# Altium PCB MSXIV_BatteryModuleConnectorBoard.PcbDoc
Units mm, origin at the board's own origin, x right, y up, seen from the top; angles counter-clockwise.
Board outline 46.4 x 46.3 mm, 2 copper layers (Top Layer, Bottom Layer); 15 components, 22 nets, 56 pads, 0 vias.
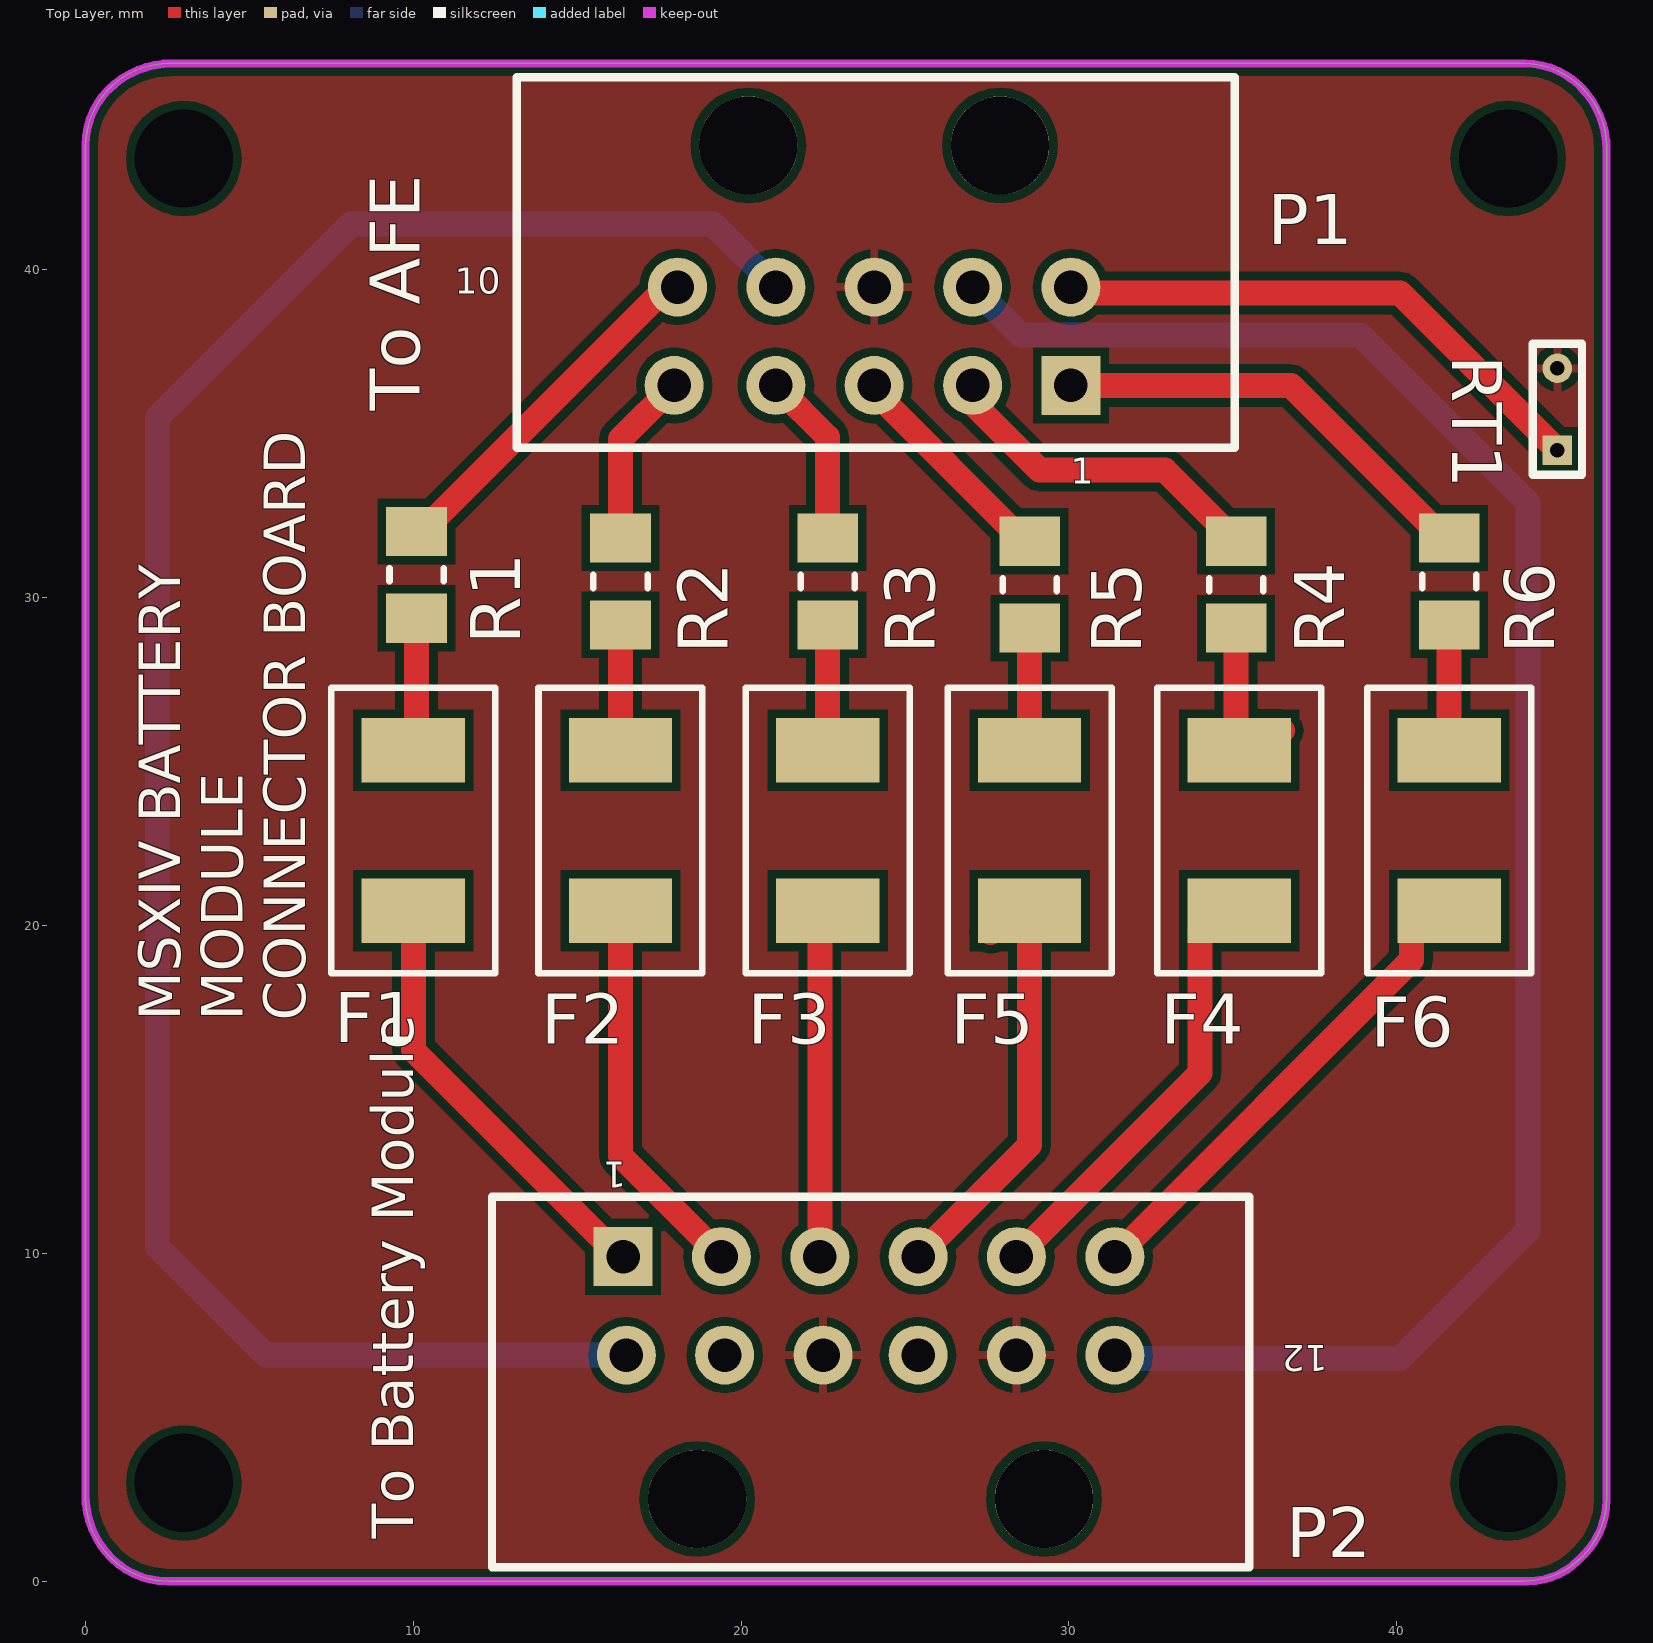
[diagram p0: Top Layer view]
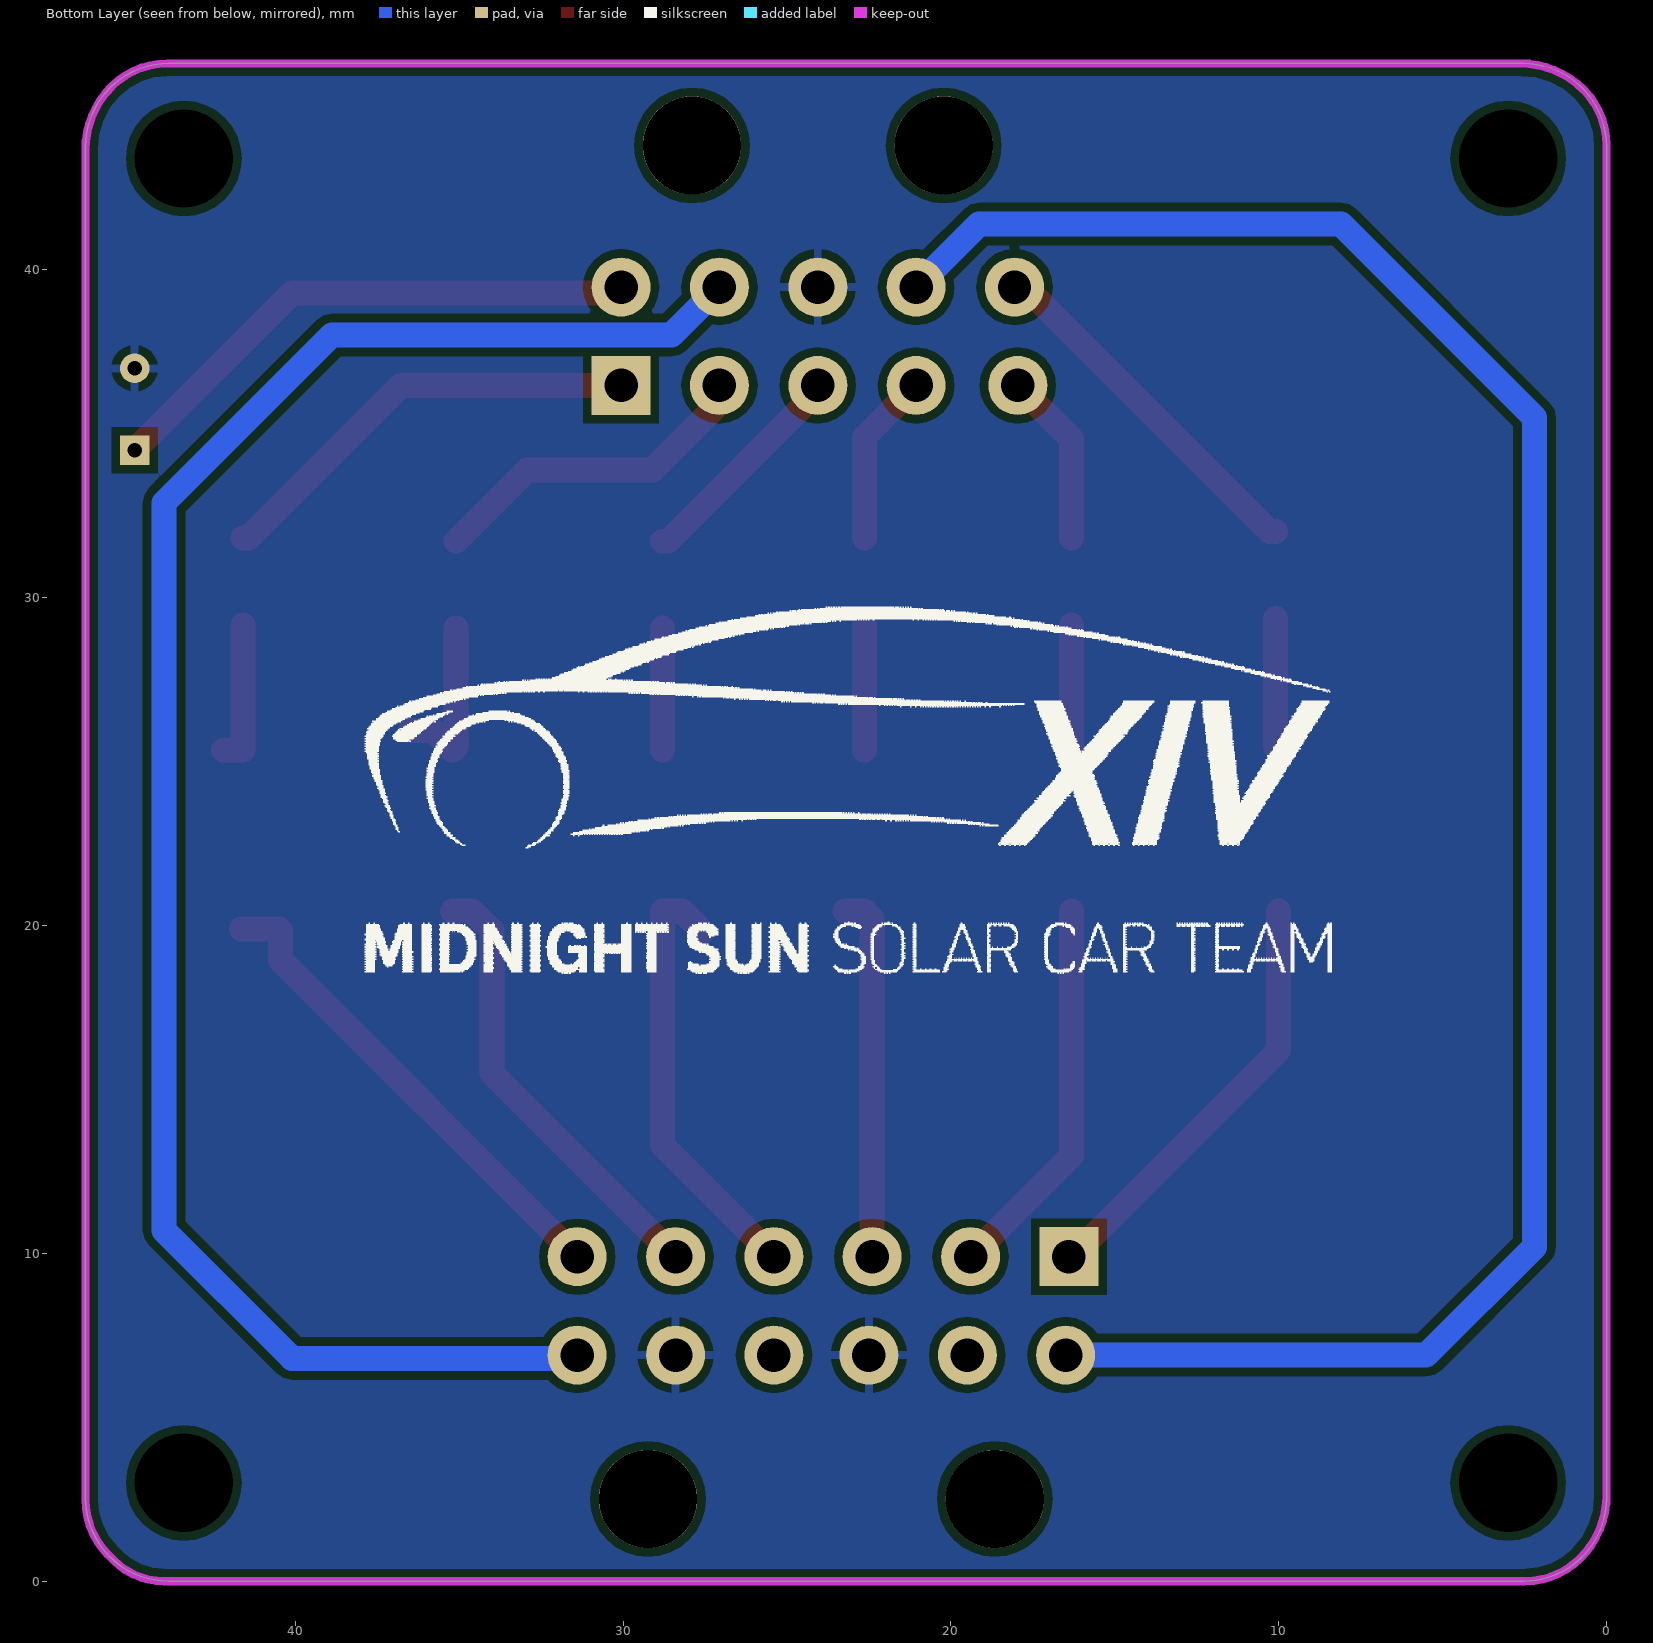
[diagram p1: Bottom Layer view, seen from below]
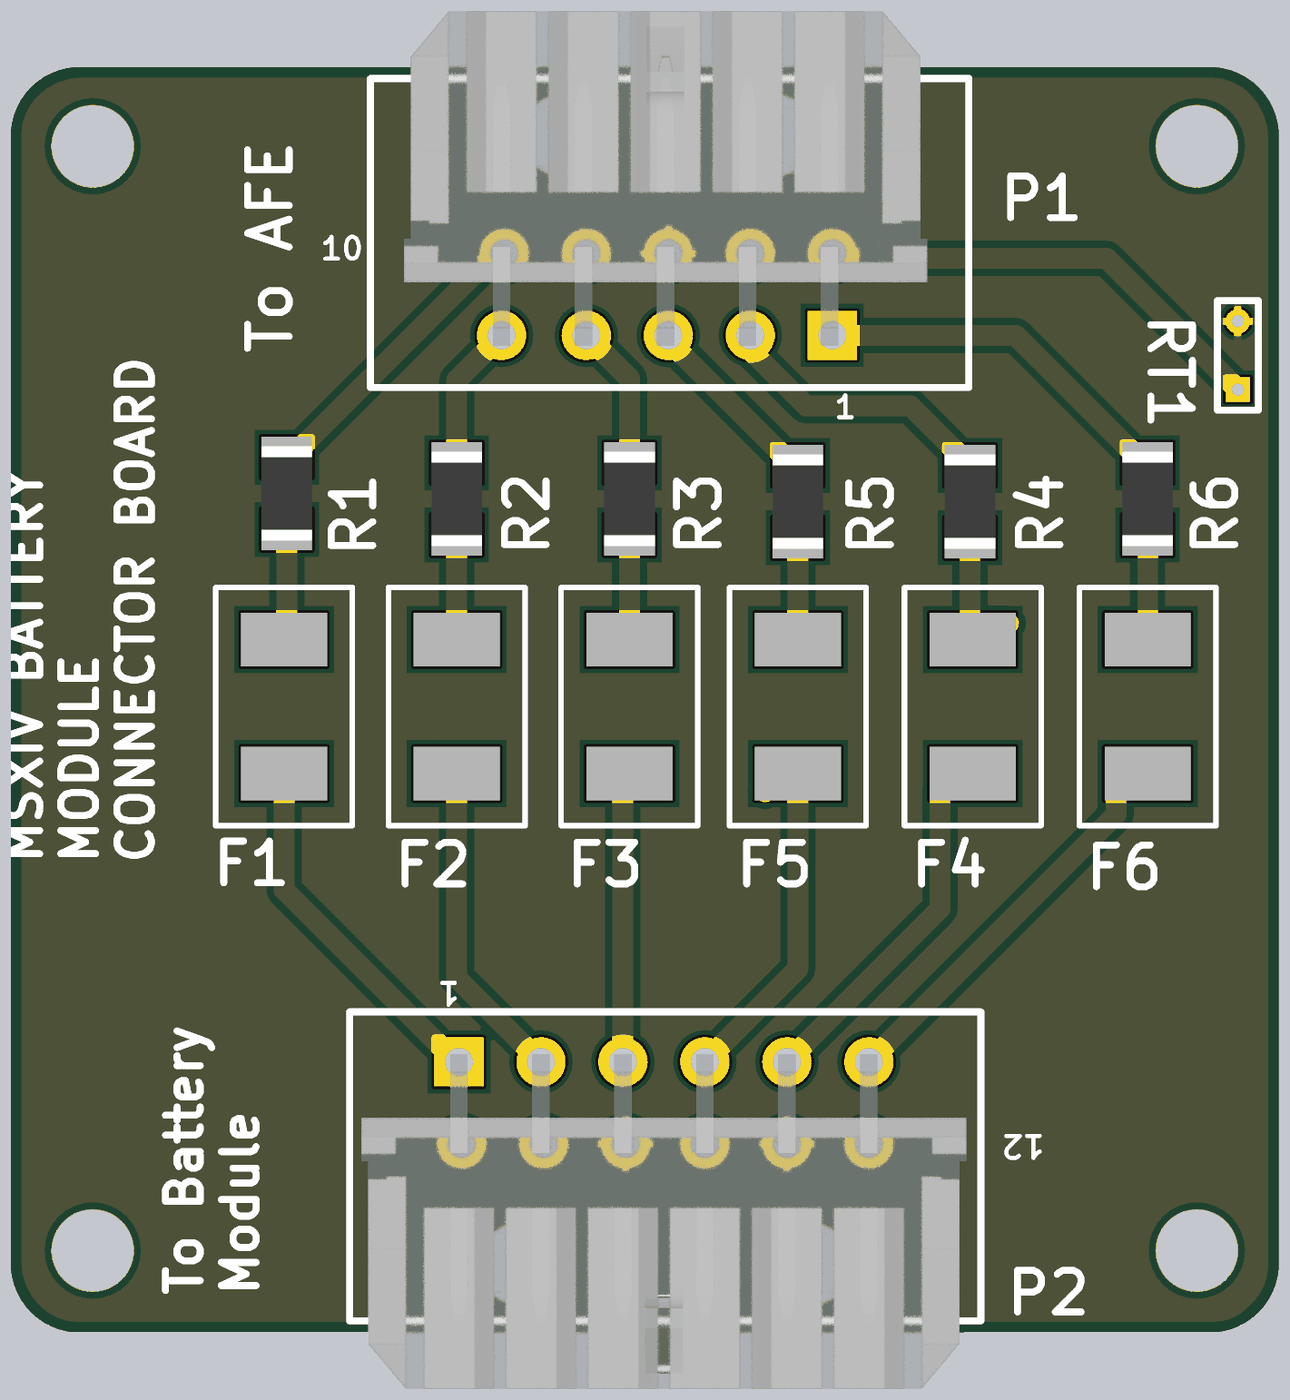
[diagram p2: 3D render of the assembled board from above, using the file's embedded part models]

## Layer stack, top to bottom
Top Solder: solder mask 0.0102, Solder Resist, Dk 3.5
Top Layer: signal copper 0.0356
Dielectric 1: dielectric 0.32, FR-4, Dk 4.8
Bottom Layer: signal copper 0.0356
Bottom Solder: solder mask 0.0102, Solder Resist, Dk 3.5

## Board outline
0,2.54 ccw(c2.54,2.54) 2.54,0 43.86,0 ccw(c43.86,2.54) 46.4,2.54 46.4,43.76 ccw(c43.86,43.76) 43.86,46.3 2.54,46.3 ccw(c2.54,43.76) 0,43.76

## Design rules (kind name [scope] priority, off if disabled: settings)
Clearance [All] p1: gap=0.254 ignorepadtopadclearanceinfootprint=FALSE except(0: Arc-Hole Track-Hole SMDPad-Hole THPad-Hole Via-Hole Fill-Hole Poly-Hole Region-Hole Text-Hole)
PolygonConnect [All] p1: connectstyle=Relief reliefconductorwidth=0.254 reliefentries=4 polygonreliefangle="90 Angle" airgapwidth=0.254
RoutingVias [All] p1: holewidth=0.711 width=1.27 viastyle="Through Hole" minholewidth=0.711 minwidth=1.27 maxholewidth=0.711 maxwidth=1.27
SolderMaskExpansion [All] p1: expansion=0.102 istentingtop=FALSE
Width [All] p1: maxlimit=0.762 minlimit=0.254 preferedwidth=0.508 toplayer_prefwidth=0.254 minimp=50.000000 maximp=50.000000 favimp=50.000000
30 further rules are at their usual default settings.

## Components (designator, comment, footprint, x,y, rotation, side; value= is the part's Value field where it differs from the comment)
F1 "500mA 250V" "FUSE JFC2410-0500FS" 10,22.9 r270 top
F2 "500mA 250V" "FUSE JFC2410-0500FS" 16.32,22.9 r90 top
F3 "500mA 250V" "FUSE JFC2410-0500FS" 22.64,22.9 r270 top
F4 "500mA 250V" "FUSE JFC2410-0500FS" 35.2,22.9 r90 top
F5 "500mA 250V" "FUSE JFC2410-0500FS" 28.8,22.9 r270 top
F6 "500mA 250V" "FUSE JFC2410-0500FS" 41.6,22.9 r90 top
P1 "CONN 10POS MICRO-FIT  R/A3mm" "CONN, 10POS R/A MICROFIT" 30.06,39.48 r0 top
P2 "CONN 12POS HEADER R/A MICROFIT 3MM" "CONN, 12POS R/A MICROFIT" 16.5,6.9 r180 top
R1 "RES 2 OHM 1% 1/4W 1206" "RES 1206" 10.1,30.7 r270 top
R2 "RES 2 OHM 1% 1/4W 1206" "RES 1206" 16.321,30.5 r90 top
R3 "RES 1 OHM 5% 1/4W 1206" "RES 1206" 22.641,30.5 r270 top
R4 "RES 1 OHM 5% 1/4W 1206" "RES 1206" 35.1,30.4 r90 top
R5 "RES 2 OHM 1% 1/4W 1206" "RES 1206" 28.8,30.4 r270 top
R6 "RES 2 OHM 1% 1/4W 1206" "RES 1206" 41.601,30.5 r90 top
RT1 "10K NTC" "NTC THERMISTOR BEAD" 44.9,34.5 r90 top

## Footprints (in the part's own frame and the unit in brackets; to place one, negate y for a bottom-side part, rotate by r counter-clockwise, add the part's x,y. Pads: shape width x height; smd on the part's side, far side on the other; paste and mask are expansions set on the pad)
"CONN, 10POS R/A MICROFIT" [mm]
  rect 1.8x1.8 hole 1.02: 1(0,-3)
  round 1.8 hole 1.02: 2(-3,-3) 3(-6,-3) 4(-9,-3) 5(-12.1,-3) 6(0,0) 7(-3,0) 8(-6,0) 9(-9,0) 10(-12,0)
  round 3 hole 3: ""(-9.84,4.32) ""(-2.16,4.32)
  silkscreen extent -16.9,-4.9 5,6.4, body extent -15.68,-3.39 3.47,8.85, height 8.02
"CONN, 12POS R/A MICROFIT" [mm]
  rect 1.8x1.8 hole 1.02: 1(0.1,-3)
  round 1.8 hole 1.02: 2(-2.9,-3) 3(-5.9,-3) 4(-8.9,-3) 5(-11.9,-3) 6(-14.9,-3) 7(0,0) 8(-3,0) 9(-6,0) 10(-8.9,0) 11(-11.9,0) 12(-14.9,0)
  round 3 hole 3: ""(-12.74,4.39) ""(-2.16,4.39)
  silkscreen extent -19,-4.83 4.1,6.47, body extent -18.47,-3.29 3.67,8.95, height 8.02
"FUSE JFC2410-0500FS" [mm]
  rect 1.96x3.15 smd: 1(-2.45,0) 2(2.45,0)
  silkscreen extent -4.36,-2.5 4.36,2.5
"NTC THERMISTOR BEAD" [mm] "NTC Thermistor 10k Bead"
  rect 0.9x0.9 hole 0.45: 1(0,0)
  round 0.9 hole 0.45: 2(2.5,0)
  silkscreen extent -0.75,-0.75 3.25,0.75
"RES 1206" [mm] "Chip Resistor, 2-Leads, Body 3.20x1.60mm, IPC Medium Density"
  rect 1.5x1.85 smd: 1(-1.325,0) 2(1.325,0)
  silkscreen extent -0.2,-0.82 0.2,0.82, body extent -1.73,-0.92 1.73,0.92, height 0.64

## Part data
F1 F2 F3 F4 F5 F6: library part "FUSE 500MA LCSC", "2410 Surface Mount Fuses RoHS", Manufacturer 1="Shenzen JDT Fuse", Manufacturer Part Number 1=JFC2410-0500FS, Supplier Part Number 1=C136360, ComponentLink1Description="Shenzhen JDT Fuse", ComponentLink1URL=https://datasheet.lcsc.com/szlcsc/1809211424_Shenzhen-JDT-Fuse-JFC2410-0500FS_C136360.pdf, Pricing 1=1=0.0591USD, Supplier 1=LCSC
P1: "CONN HEADER R/A 10POS 3MM", Color=Black, Contact Resistance=10mR, Flammability Rating="UL94 V-0", Manufacturer 1=Molex, Manufacturer Part Number 1=0430451000, Max Operating Temperature=105°C, Max Voltage Rating (AC)=250V, Min Operating Temperature=-40°C, Supplier Part Number 1=WM1817-ND, Category="Headers and Wire Housings", ComponentLink1Description=https://datasheet.ciiva.com/6814/430450202-sd-6814012.pdf?src-supplier=Digi-Key, ComponentLink1URL=https://datasheet.ciiva.com/6814/430450202-sd-6814012.pdf?src-supplier=Digi-Key, Connector Type="Male Pin", Contact Material=Brass, Contact Plating=Tin, Depth=12.2mm, Fastening Type=Ramp, Housing Color=Black, Housing Material=Polymer, Length=19.15mm, Mount="Through Hole", Number of Contacts=10, Number of Positions=10, Number of Rows=2, Orientation="Right Angle", Packaging=Tray, Pitch=3mm, Pricing 1="1=2.57000, 10=2.33100, 100=1.99790, 500=1.66496, 1000=1.42710, 5000=1.26536 (USD)", RoHS=Yes, Row Spacing=0.118inch, Stock 1=2003, Supplier 1=Digi-Key, Termination=Solder
P2: library part "CONN 12POS HEADER R/A 3MM", "Conn Power HDR 12 POS 3mm Solder RA Thru-Hole 12 Terminal 1 Port Micro-Fit 3.0™ Tray", Color=Black, Contact Resistance=10mR, Flammability Rating="UL94 V-0", Manufacturer 1=Molex, Manufacturer Part Number 1=0430451200, Max Operating Temperature=105°C, Max Voltage Rating (AC)=250V, Min Operating Temperature=-40°C, Supplier Part Number 1=WM1818-ND, Category="Headers and Wire Housings", ComponentLink1Description=https://datasheet.ciiva.com/6814/430450202-sd-6814012.pdf?src-supplier=Digi-Key, ComponentLink1URL=https://datasheet.ciiva.com/6814/430450202-sd-6814012.pdf?src-supplier=Digi-Key, Connector Type="Male Pin", Contact Material=Brass, Contact Plating=Tin, Depth=12.2mm, Fastening Type=Ramp, Housing Color=Black, Housing Material=Polymer, Length=22.15mm, Mount="Through Hole", Number of Contacts=12, Number of Positions=12, Number of Rows=2, Orientation="Right Angle", Packaging=Tray, Pitch=3mm, Pricing 1="1=2.73000, 10=2.62200, 100=2.18500, 500=1.85726, 1000=1.58413, 5000=1.42025 (USD)", RoHS=Yes, Row Spacing=0.118inch, Stock 1=5742, Supplier 1=Digi-Key, Termination=Solder
R1 R2 R5 R6: "2 ±1% 1/4W 1206 Chip Resistor - Surface Mount RoHS", Case/Package=1206, Manufacturer=TyoHM, Manufacturer Part Number=RMC120621%N, Power Rating=250mW, Resistance=2R, Voltage Rating (DC)=200V, Category="Chip SMD Resistors", Lead Free="Lead Free", RoHS=No, Supplier 1=LCSC
R3 R4: "1 ±5% 1/4W 1206 Chip Resistor - Surface Mount RoHS", Manufacturer 1=TyoHM, Manufacturer Part Number 1=RMC120615%N, Supplier Part Number 1=C325901, Supplier 1=LCSC
RT1: library part "NTC THERMISTOR 10K 1% BEAD", "NTC Thermistor 10k Bead", B Value Tolerance=±1%, Manufacturer="Murata Electronics North America", Manufacturer Part Number=NXRT15XH103FA1B030, Operating Temperature="-40°C ~ 125°C", Package / Case=Bead, Resistance in Ohms @ 25°C=10k, Supplier Part Number 1=490-8601-ND, B0/50=-, B25/50=3380K, B25/75=-, B25/85=3434K, B25/100=3455K, Category="Sensors, Transducers", ComponentLink1Description=https://www.murata.com/~/media/webrenewal/support/library/catalog/products/thermistor/ntc/r44e.ashx, ComponentLink1URL=https://www.murata.com/~/media/webrenewal/support/library/catalog/products/thermistor/ntc/r44e.ashx, Length - Lead Wire=-, Mounting Type="Through Hole", Packaging=Bulk, Part Status=Active, Pricing 1="1=0.96, 5=0.91, 10=0.792, 25=0.696, 50=0.5784, 100=0.4925, 500=0.42834, 1000=0.3748, 5000=0.33197 (CAD)", Resistance Tolerance=±1%, RoHS="RoHS Compliant", Stock 1=25017, Supplier 1=Digi-Key

## Free pads (board coordinates)
  round 2.7 hole 3: ""(3,3) ""(3,43.4) ""(43.4,3) ""(43.4,43.4)

## Nets (pads, with @x,y where several pads share a name; then routed paths per layer and width w, separated by ;. In a path a pad name is that pad's centre, name@x,y a point inside that pad or via, vN(x,y) a via of type N, cw(c..) or ccw(c..) an arc to the next point about the centre after c; other vN are vias at no path point)
"Balance Tap 1": P1.5 R2.2 | length 5.3
  Top Layer w0.762: R2.2 16.321,34.841 P1.5
"Balance Tap 2": P1.2 R4.2 | length 10.3
  Top Layer w0.762: P1.2@26.86,36.14 29.1,33.9 32.925,33.9 R4.2 ; P1.2@27.06,36.199 P1.2
"Balance Tap 3": P1.1 R6.2 | length 13.5
  Top Layer w0.762: P1.1 36.771,36.48 41.426,31.825 R6.2
GND: P1.8 P2.9 P2.11 RT1.2
NetF1_1: F1.1 R1.2 | length 4.1
  Top Layer w0.762: F1.1 10.1,25.45 R1.2
NetF1_2: F1.2 P2.1 | length 13.3
  Top Layer w0.762: F1.2 10,16.2 15.781,10.419 15.881,10.419 P2.1
NetF2_1: F2.1 P2.2 | length 11.8
  Top Layer w0.762: F2.1 16.32,12.98 P2.2
NetF2_2: F2.2 R2.1 | length 3.8
  Top Layer w0.762: F2.2 16.321,25.351 R2.1
NetF3_1: F3.1 R3.2 | length 3.8
  Top Layer w0.762: F3.1 22.641,25.351 R3.2
NetF3_2: F3.2 P2.3 | length 11.2
  Top Layer w0.762: P2.3 22.4,20.21 F3.2 F3.2@23.235,20.45
NetF4_1: F4.1 P2.5 | length 13.7
  Top Layer w0.762: P2.5 34.006,15.506 34.006,19.851 34.605,20.45 F4.1
NetF4_2: F4.2 R4.1 | length 5.3
  Top Layer w0.762: R4.1 35.1,25.45 F4.2 35.799,25.949 F4.2@36.509,25.949
NetF5_1: F5.1 R5.2 | length 3.7
  Top Layer w0.762: F5.1 R5.2
NetF5_2: F5.2 P2.4 | length 13.5
  Top Layer w0.762: P2.4 28.8,13.3 F5.2 28.205,20.45 27.606,19.851 F5.2@27.606,19.786
NetF6_1: F6.1 P2.6 | length 14.9
  Top Layer w0.762: P2.6 40.451,18.951 40.451,19.851 40.5,19.9 F6.1@41.64,19.9
NetF6_2: F6.2 R6.1 | length 4.4
  Top Layer w0.762: R6.1 41.601,25.351 F6.2 F6.2@42.195,25.35
"Thermistor 1+": P1.9 P2.7 | length 62.8
  Bottom Layer w0.762: P2.7@16.225,6.9 5.5,6.9 2.2,10.2 2.2,35.5 8.1,41.4 19.14,41.4 P1.9
"Thermistor 2+": P1.7 P2.12 | length 56.1
  Bottom Layer w0.762: P1.7 28.525,38.015 38.885,38.015 44,32.9 44,10.7 40.1,6.8 P2.12@31.356,6.8
"Thermistor 3": P1.6 RT1.1 | length 16.5
  Top Layer w0.762: P1.6@30.369,39.3 40.1,39.3 RT1.1
"Voltage Tap 1": P1.10 R1.1 | length 11
  Top Layer w0.762: R1.1 10.275,32.025 17.531,39.281 17.861,39.281 P1.10
"Voltage Tap 2": P1.4 R3.1 | length 5.3
  Top Layer w0.762: P1.4 22.641,34.899 R3.1
"Voltage Tap 3": P1.3 R5.1 | length 6.8
  Top Layer w0.762: P1.3 24.06,36.29 28.625,31.725 R5.1
pads on no net: P1. P2. P2.8 P2.10

## Polygon pours and split planes (outlines as drawn)
GND on Top Layer "TopLayer_GND" (solid, pour order 6): 0,2.54 ccw(c2.54,2.54) 2.54,0 43.86,0 ccw(c43.86,2.54) 46.4,2.54 46.4,43.76 ccw(c43.86,43.76) 43.86,46.3 2.54,46.3 ccw(c2.54,43.76) 0,43.76
GND on Bottom Layer "TopLayer_GND" (solid, pour order 7): 0,2.54 ccw(c2.54,2.54) 2.54,0 43.86,0 ccw(c43.86,2.54) 46.4,2.54 46.4,43.76 ccw(c43.86,43.76) 43.86,46.3 2.54,46.3 ccw(c2.54,43.76) 0,43.76

## Keep-outs
Keep-Out Layer:
  lines w0.254: 0,2.631 ccw(c2.731,2.631) 0.8,0.7 ccw(c2.49,2.39) 2.49,0 44,0 ccw(c44,2.173) 45.536,0.636 45.7,0.8 ccw(c44.01,2.49) 46.4,2.49 46.4,3.2 46.4,43.669 ccw(c43.669,43.669) 45.6,45.6 ccw(c43.91,43.91) 43.91,46.3 43.4,46.3 2.631,46.3 ccw(c2.631,43.569) 0.7,45.5 ccw(c2.39,43.81) 0,43.81 0,2.631

## Silkscreen, mask and mechanical layers (free items; w line width, h text height)
Top Overlay:
  text "To AFE" at 10.2,35.7 h1.52 r90
  text "MSXIV BATTERY / MODULE / CONNECTOR BOARD" at 6.7,17.1 h1.27 r90
  text "To Battery Module" at 10,1.3 h1.27 r90
Bottom Overlay:
  drawing of 32 lines, arcs and shapes, not listed

## Text inside footprints (layer, text, board x,y; h text height)
P1: Top Overlay "10" at 11.26,39.28 h0.8; Top Overlay "1" at 30.06,33.48 h0.8
P2: Top Overlay "1" at 16.5,12.8 h0.8 r180; Top Overlay "12" at 37.9,7.2 h0.8 r180